# Altium PCB 7797-20-0224.PcbDoc
Units mil, origin at the board's own origin, x right, y up, seen from the top; angles counter-clockwise.
Board outline 1680 x 2600 mil, 2 copper layers (Top Layer, Bottom Layer), stack 12.8 mil thick; 102 components, 77 nets, 367 pads, 199 vias.
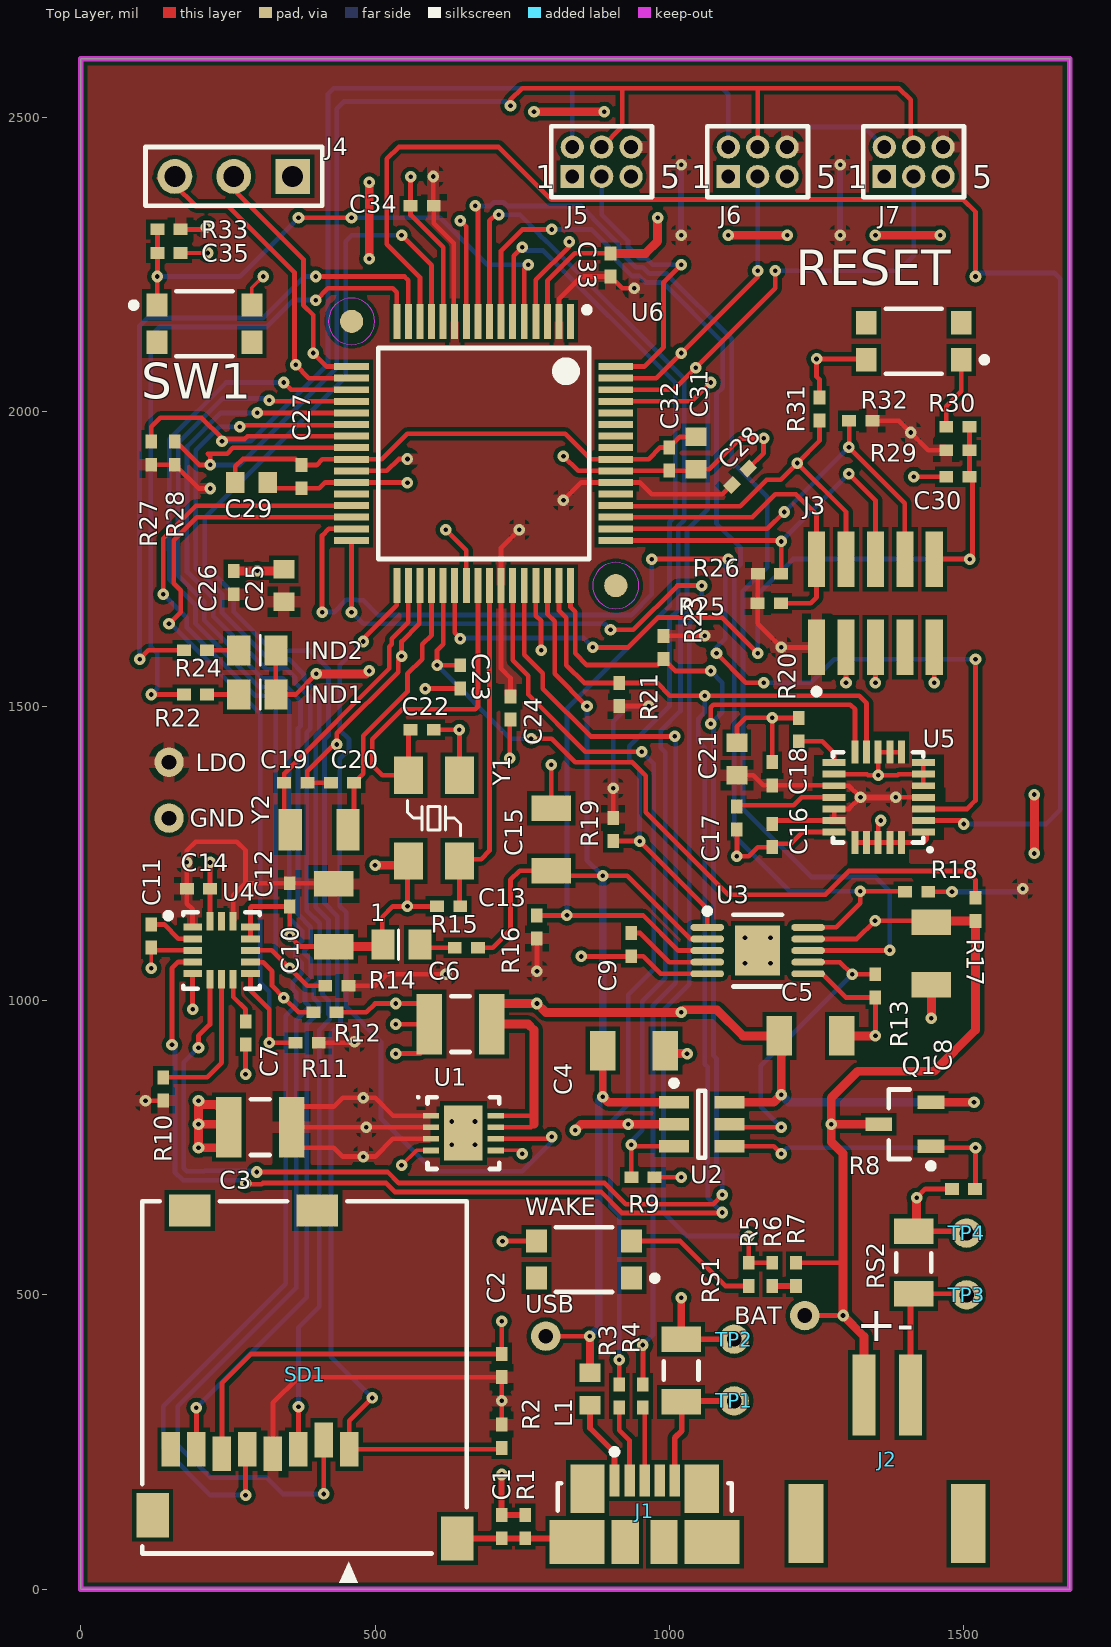
[diagram p0: Top Layer view]
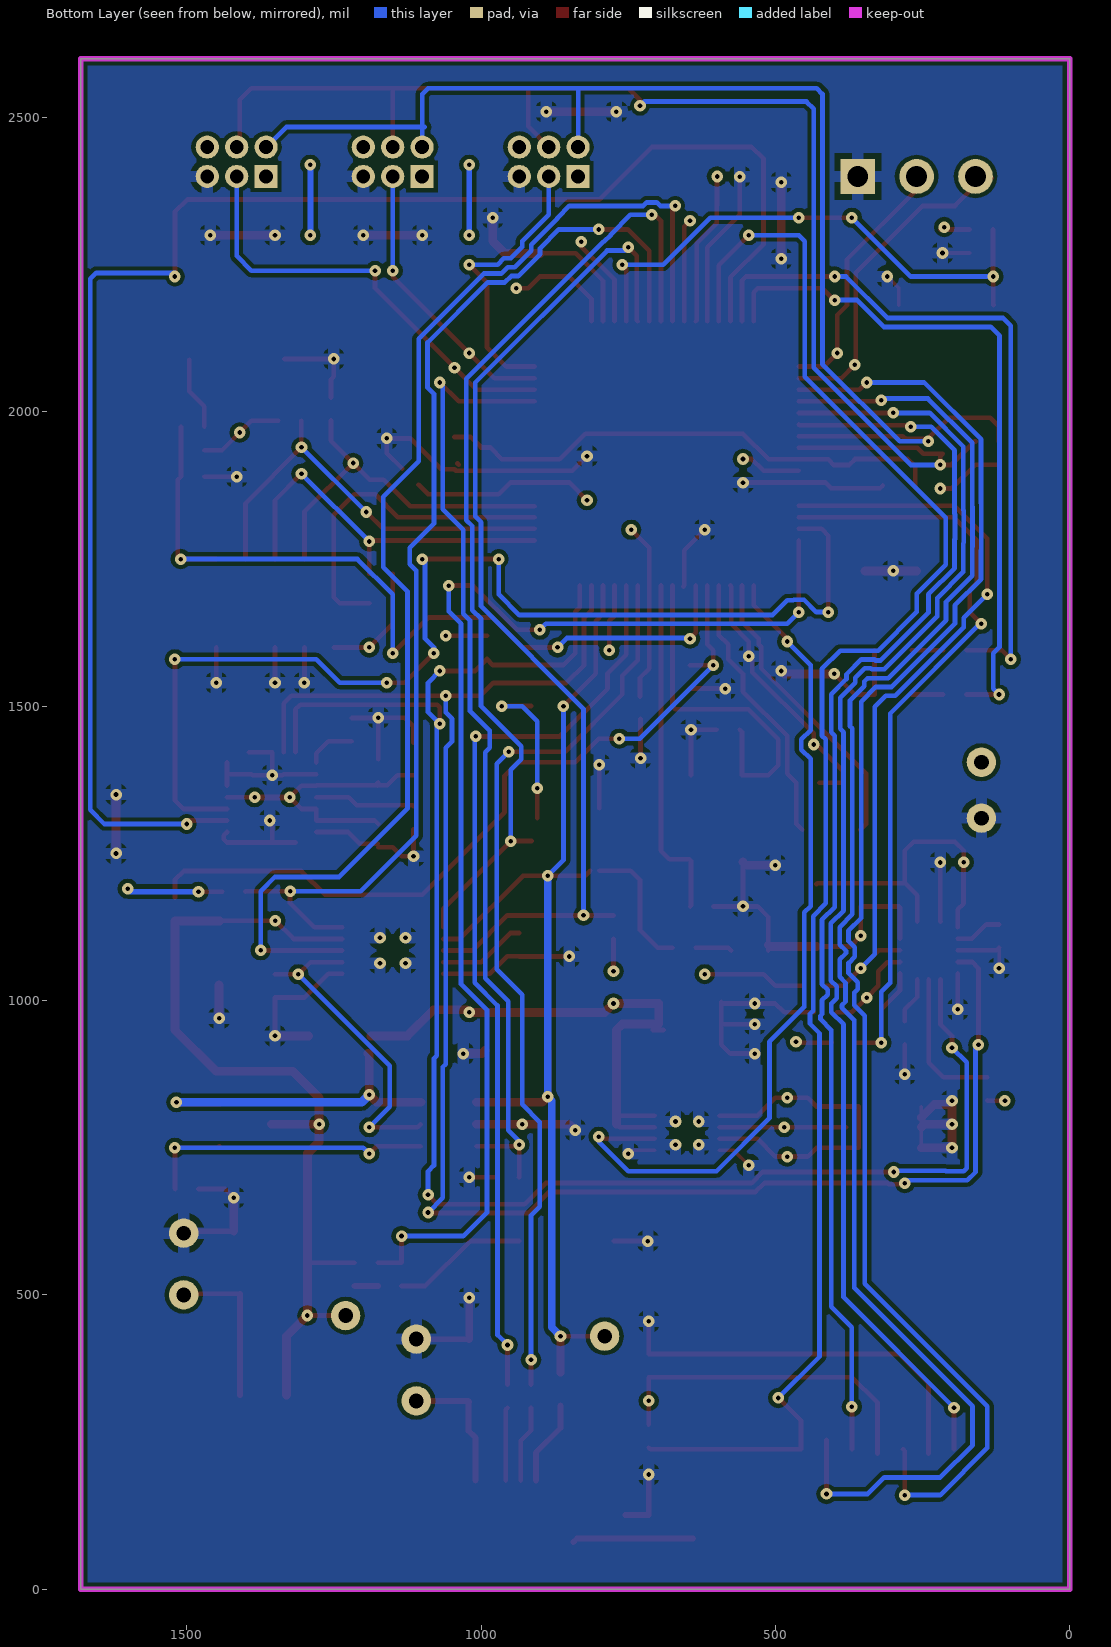
[diagram p1: Bottom Layer view, seen from below]

## Layer stack, top to bottom
Top Solder: solder mask 0.4, Solder Resist, Dk 3.5
Top Layer: signal copper 1.4
Dielectric 2: core 10, Dk 4.2
Bottom Layer: signal copper 1.4
Bottom Solder: solder mask 0.4, Solder Resist, Dk 3.5

## Board outline
20,0 1680,0 1680,2600 0,2600 0,0

## Design rules (kind name [scope] priority, off if disabled: settings)
AcuteAngle [All] p1: minimum=6.00000000000000E+0001 checktracksonly=FALSE
Clearance Clearance-uC [InComponent('U6')] p1: gap=6
Clearance [All] p2: gap=7
MinimumAnnularRing [All] p1: minimumring=5
PolygonConnect PolygonConnect_2 [All vs IsNamedPolygon('Bottom layer_full')] p1: connectstyle=Relief reliefconductorwidth=20 reliefentries=4 polygonreliefangle="90 Angle" airgapwidth=10
PolygonConnect PolygonConnect_1 [All vs IsNamedPolygon('Top layer_full')] p2: connectstyle=Relief reliefconductorwidth=20 reliefentries=4 polygonreliefangle="90 Angle" airgapwidth=10
PolygonConnect [All] p3: connectstyle=Relief reliefconductorwidth=10 reliefentries=4 polygonreliefangle="90 Angle" airgapwidth=10
RoutingVias [All] p1: holewidth=28 width=50 viastyle="Through Hole" minholewidth=28 minwidth=50 maxholewidth=28 maxwidth=50 useviatemplates=TRUE viatemplateguid#1={3E3A0D4B-A0A5-4DA1-8870-E81B4EFEB651} viatemplatename#1=v50h20
SolderMaskExpansion [All] p1: expansion=4
Width "Width Power" [(InNet('sGND') OR InNet('sPWR_3V7') OR InNet('sPWR_5V0') OR InNet('sUNREG') OR InNet('NetJ203_1') OR InNet('NetJ200_1') OR InNet('NetJ200_5'))] p1: maxlimit=15 minlimit=6 preferedwidth=15
Width [All] p2: maxlimit=10 minlimit=8 preferedwidth=8
30 further rules are at their usual default settings.

## Classes and differential pairs
component class I/O: 1 C35 IND1 IND2 J4 R15 R22 R24 R33 SW1
component class "I2C 0": R21 R23
component class "Accelerometer and Mangnetometer": C7 C10 C11 C12 C14 R10 R11 R12 R14 U4
component class Microcontroller: 90 C13 C19 C20 C22 C23 C24 C25 C26 C27 C28 C29 C30 C31 C32 C33 C34 J3 R5 R6 R7 R17 R25 R26 R29 R30 R31 R32 RESET U6 WAKE Y1 Y2
component class Power: BAT C1 C3 C4 C5 C6 C8 C9 C15 GND J1 J2 L1 LDO Q1 R1 R3 R4 R8 R9 R13 R16 R18 R19 RS1 RS2 TP1 TP2 TP3 TP4 U1 U2 U3 USB
component class Gyroscope: C16 C17 C18 C21 R20 U5
component class "I2C 1": J5 J6 J7 R27 R28
component class "Micro SD": C2 R2 SD1

## Components (designator, comment, footprint, x,y, rotation, side; value= is the part's Value field where it differs from the comment)
1 "LTST-C171TBKT" 0805 545,1095 r180 top
BAT "TP" TP_TH 1230,465 r90 top
C1 "GRM155R71A104KA01D" 0402 715,106.38 r270 top
C2 "GRM155R71C103KA01D" 0402 715,380 r270 top
C3 "GRM32ER71H106KA12L" 1210 305,785 r0 top
C4 "GRM31CR71H475KA12L" 1206 940,915 r180 top
C5 "GRM31CR71H475KA12L" 1206 1240,940 r180 top
C6 "GRM32ER71H106KA12L" 1210 645,960 r0 top
C7 "GRM155R71A104KA01D" 0402 280,945 r270 top
C8 "GRM31CR71H475KA12L" 1206 1445,1080 r90 top
C9 "GRM155R71A104KA01D" 0402 935,1095 r90 top
C10 "GRM31CR71H475KA12L" 1206 430,1145 r90 top
C11 "GRM155R71A104KA01D" 0402 120,1109.69 r270 top
C12 "GRM155R71A104KA01D" 0402 355,1179.68 r90 top
C13 "GRM1555C1H330FA01D" 0402 625,1160 r0 top
C14 "GRM155R71A104KA01D" 0402 200,1190 r180 top
C15 "GRM31CR71H475KA12L" 1206 799.37,1273.78 r270 top
C16 "GRM155R71A104KA01D" 0402 1174.69,1280.32 r90 top
C17 "GRM155R71A104KA01D" 0402 1114.69,1310.32 r270 top
C18 "GRM155R71A104KA01D" 0402 1174.69,1385.32 r270 top
C19 "GRM1555C1H240GA01D" 0402 365.32,1370 r180 top
C20 "GRM1555C1H240GA01D" 0402 444.69,1370 r0 top
C21 "GRM188R71A105KA61J" 0603 1114.69,1410.32 r90 top
C22 "GRM1555C1H330FA01D" 0402 580,1460 r180 top
C23 "GRM155R71A104KA01D" 0402 645,1550 r270 top
C24 "GRM155R71A104KA01D" 0402 730,1497 r270 top
C25 "GRM188R71A105KA61J" 0603 345,1705 r90 top
C26 "GRM155R71C103KA01D" 0402 260,1710 r90 top
C27 "GRM155R71A104KA01D" 0402 375,1890 r270 top
C28 "GRM155R71C103KA01D" 0402 1120,1890 r45 top
C29 "GRM188R71A225KE15D" 0603 290,1880 r0 top
C30 "GRM155R71A104KA01D" 0402 1490,1890 r180 top
C31 "GRM188R71A105KA61J" 0603 1045,1930 r270 top
C32 "GRM155R71A104KA01D" 0402 1000,1920 r270 top
C33 "GRM155R71C103KA01D" 0402 900,2249.69 r90 top
C34 "GRM155R71A104KA01D" 0402 580,2350 r180 top
C35 "GRM022R71A102KA12L" 0402 150,2270 r180 top
GND "TP" TP_TH 150,1310 r90 top
IND1 "LTST-C171GKT" 0805 300,1520 r0 top
IND2 "LTST-C171KSKT" 0805 300,1595 r0 top
J1 "47346-0001" MOLX-47346-0001-5_V 957.97,87.87 r0 top locked
J2 "S2B-PH-SM4-TB" S2B-PH-SM4-TB 1370,330 r0 top locked
J3 "M50-3600542" M50-3600542 1350,1675 r0 top
J4 "Header 3" HDR1X3 360,2400 r180 top
J5 "GRPB032VWVN-RC" GRPB032VWVN-RC 835,2400 r0 top
J6 "GRPB032VWVN-RC" GRPB032VWVN-RC 1100,2400 r0 top
J7 "GRPB032VWVN-RC" GRPB032VWVN-RC 1365,2400 r0 top
L1 "MPZ1608S331A" 1608[0603] 865,340 r90 top
LDO "TP" TP_TH 150,1405 r90 top
Q1 "IRLML6401" Micro3_N 1400,790 r180 top
R1 "CRCW04021M00FKEDHP" 0402 755,106.38 r270 top
R2 "CRCW040210K0FKEDHP" 0402 715,260 r90 top
R3 "CRCW040233R0FKED" 0402 915,328.19 r90 top
R4 "CRCW040233R0FKED" 0402 955,328.19 r90 top
R5 "CRCW0402100KFKED" 0402 1135,535 r90 top
R6 "CRCW0402100KFKED" 0402 1175,535 r90 top
R7 "CRCW0402100KFKED" 0402 1215,535 r270 top
R8 "CRCW04021M00FKEDHP" 0402 1499.69,680 r0 top
R9 "CRCW040210K0FKED" 0402 955,700 r180 top
R10 "CRCW040210K0FKED" 0402 140,850 r270 top
R11 "CRCW040210K0FKED" 0402 384.69,928.33 r180 top
R12 "CRCW040210K0FKED" 0402 415,980 r0 top
R13 "CRCW04023K40FKED" 0402 1350,1025 r90 top
R14 "CRCW040210K0FKED" 0402 435,1025 r180 top
R15 "CRCW0402560RFKEDHP" 0402 655,1090 r0 top
R16 "CRCW040210K0FKED" 0402 775,1125 r90 top
R17 "CRCW040256R0FKED" 0402 1520,1155 r270 top
R18 "CRCW040210K0FKED" 0402 1420,1185 r180 top
R19 "CRCW040210K0FKED" 0402 904.37,1290.63 r270 top
R20 "CRCW040210K0FKED" 0402 1219.69,1460.32 r90 top
R21 "CRCW04025K60FKEDHP" 0402 915,1520 r270 top
R22 "CRCW0402560RFKEDHP" 0402 195,1520 r180 top
R23 "CRCW04025K60FKEDHP" 0402 990,1600 r90 top
R24 "CRCW0402560RFKEDHP" 0402 195,1595 r180 top
R25 "CRCW040210K0FKED" 0402 1169.69,1675 r0 top
R26 "CRCW040210K0FKED" 0402 1170,1725 r0 top
R27 "CRCW04025K60FKEDHP" 0402 120,1930 r270 top
R28 "CRCW04025K60FKEDHP" 0402 160,1930 r270 top
R29 "CRCW040210K0FKED" 0402 1490,1935 r180 top
R30 "CRCW0402560RFKEDHP" 0402 1490,1975 r0 top
R31 "CRCW040210K0FKED" 0402 1255,2005 r270 top
R32 "CRCW040210K0FKED" 0402 1325,1985 r180 top
R33 "CRCW040210K0FKEDHP" 0402 150,2310 r0 top
RESET "KMR231GLFS" CKCP-KMR231GLFS 1415,2120 r180 top
RS1 "WSL1206R1000FEA" C1206 1020,371.5 r270 top
RS2 "WSL1206R1000FEA" C1206 1415,555 r270 top
SD1 "2908-05WB-MG" 3M-2908-05WB-MG_V 380,360 r180 top locked
SW1 "KMR231GLFS" CKCP-KMR231GLFS 210,2150 r0 top
TP1 "TP" TP_TH 1110,320 r90 top
TP2 "TP" TP_TH 1110,425 r90 top
TP3 "TP" TP_TH 1505,500 r90 top
TP4 "TP" TP_TH 1505,605 r90 top
U1 "LT1965EDD-3.3#TRPBF" LT-DD-8_V 650,775 r0 top
U2 "LTC4410ES6#PBF" LT-S6-6-TSOT-23_N 1055,790 r0 top
U3 "LTC4053EMSE-4.2#PBF" LT-MSE-10-EDP-2060x1830TP_N 1150,1085 r0 top
U4 "FXOS8700CQR1" FREE-QFN-16-3000X3000DE_V 239.21,1085.32 r0 top
U5 "FXAS21002C" "SMD QFN 24_4X4MM 7/5" 1354.69,1345.32 r180 top
U6 "TM4C123GH6PM" QFP50P1200X1200X160-64N 684.53,1929.41 r270 top
USB "TP" TP_TH 790,430 r90 top
WAKE "KMR231GLFS" CKCP-KMR231GLFS 855,560 r180 top
Y1 "ECS-160-20-30B-DU" ECX-53B 600,1310 r90 top
Y2 "CC7V-T1A-32.768kHz-12.5pF-20PPM-TC-QC" CC7V-T1A 405,1290 r0 top

## Footprints (in the part's own frame and the unit in brackets; to place one, negate y for a bottom-side part, rotate by r counter-clockwise, add the part's x,y. Pads: shape width x height; smd on the part's side, far side on the other; paste and mask are expansions set on the pad)
3M-2908-05WB-MG_V [mm] "Connector, MicroSD, 8 Position, Body 15.2x14mm, Pitch 1.1mm"
  rect 0.8x1.5 smd: 1(-1.94,3.1) 2(-0.84,2.7) 3(0.26,3.1) 4(1.36,3.3) 5(2.46,3.1) 6(3.56,3.3) 7(4.66,3.1) 8(5.76,3.1)
  rect 1.4x1.9 smd: 9(6.55,5.95) 12(-6.6,6.95)
  rect 1.8x1.4 smd: 10(4.95,-7.2) 11(-0.55,-7.2)
  silkscreen extent -7,-7.6 7,8.87, body extent -7,-7.6 7,7.6, height 1.85
0402 [mm] "Chip Capacitor, Body 1.0x0.5mm, IPC High Density"
  rect 0.6x0.5 smd: 1(-0.5,0) 2(0.5,0)
  body extent -0.55,-0.3 0.55,0.3, height 1.3
0603 [mm] "Chip Capacitor, Body 1.6x0.8mm, IPC High Density"
  rect 0.8x0.9 smd: 1(-0.7,0) 2(0.7,0)
  body extent -0.87,-0.48 0.87,0.48, height 1.3
0805 [mm]
  rect 1x1.3 smd: 1(-0.8,0) 2(0.8,0)
  silkscreen extent 0.13,-0.64 0.13,0.63, body extent -1.07,-0.64 1.07,0.76, height 0.7
1206 [mm] "Chip Capacitor, Body 3.2x1.6mm, IPC High Density"
  rect 1.1x1.7 smd: 1(-1.35,0) 2(1.35,0)
  body extent -1.7,-0.9 1.7,0.9, height 1.3
1210 [mm] "Chip Capacitor, Body 3.2x2.5mm, IPC High Density"
  rect 1.1x2.6 smd: 1(-1.35,0) 2(1.35,0)
  silkscreen extent -0.4,-1.2 0.4,1.2, body extent -1.7,-1.35 1.7,1.35, height 1.3
1608[0603] [mm] "Chip Capacitor, Body 1.6x0.8mm, IPC High Density"
  rect 0.8x0.9 smd: 1(-0.7,0) 2(0.7,0)
  body extent -0.87,-0.48 0.87,0.48, height 1.3
C1206 [mm] "Chip Capacitor, Body 3.2x1.6mm, IPC High Density"
  rect 1.1x1.7 smd: 1(-1.35,0) 2(1.35,0)
  silkscreen extent -0.4,-0.75 0.4,0.75, body extent -1.7,-0.9 1.7,0.9, height 1.3
CC7V-T1A [mm]
  rect 1x1.8 smd: 1(-1.25,0) 2(1.25,0)
  body extent -1.65,-0.76 1.65,0.76, height 0.9
CKCP-KMR231GLFS [mm] "SMD, 4-Leads, Body 4.6x2.8mm"
  rect 0.9x1 smd: 1(-2.05,0.8) 2(-2.05,-0.8) 3(2.05,0.8) 4(2.05,-0.8)
  silkscreen extent -3.17,-1.4 1.21,1.4, body extent -2.3,-1.4 2.3,1.4, height 1.92
ECX-53B [mm]
  rect 1.6x1.25 smd: 1(-1.85,-1.1) 2(1.85,-1.1) 3(1.85,1.1) 4(-1.85,1.1)
  silkscreen extent -0.76,-1.14 0.76,1.14, body extent -2.54,-1.65 2.54,1.65, height 0.85
FREE-QFN-16-3000X3000DE_V [mm] "QFN, 16-Leads, Body 3.00x3.00mm, Pitch 0.50mm"
  rect 0.8x0.3 smd: 1(-1.25,1) 2(-1.25,0.5) 3(-1.25,0) 4(-1.25,-0.5) 5(-1.25,-1) 9(1.25,-1) 10(1.25,-0.5) 11(1.25,0) 12(1.25,0.5) 13(1.25,1)
  rect 0.3x0.8 smd: 6(-0.5,-1.25) 7(0,-1.25) 8(0.5,-1.25) 14(0.5,1.25) 15(0,1.25) 16(-0.5,1.25)
  silkscreen extent -2.42,-1.65 1.65,1.65, body extent -1.5,-1.5 1.5,1.5, height 1.25
GRPB032VWVN-RC [mm] "Connector; Header; 3x2 Position"
  rect 1x1 hole 0.6: 1(0,0)
  round 1 hole 0.6: 2(0,1.27) 3(1.27,0) 4(1.27,1.27) 5(2.54,0) 6(2.54,1.27)
  silkscreen extent -0.9,-0.9 3.44,2.17, body extent -0.64,-1.06 3.17,2.33, height 4.17
HDR1X3 [mm] "Connector; Header; 3 Position"
  rect 1.5x1.5 hole 0.9: 1(0,0)
  round 1.5 hole 0.9: 2(2.54,0) 3(5.08,0)
  silkscreen extent -1.27,-1.27 6.35,1.27
LT-DD-8_V [mm] "SON, 8-Leads, Body 3x3mm, Pitch 0.5mm, Thermal Pad 1.65x2.38 mm, IPC Low Density"
  rect 0.7x0.25 smd mask+0.102: 1(-1.4,0.75) 2(-1.4,0.25) 3(-1.4,-0.25) 4(-1.4,-0.75) 5(1.4,-0.75) 6(1.4,-0.25) 7(1.4,0.25) 8(1.4,0.75)
  rect 1.65x2.38 smd mask+0.102: 9(0,0)
  silkscreen extent -2,-1.55 1.55,1.6, body extent -1.5,-1.5 1.5,1.5, height 0.8
LT-MSE-10-EDP-2060x1830TP_N [mm] "SOP, 10-Leads, Body 3.1x3.1mm, Pitch 0.5mm, Thermal Pad 2.17x1.94mm, IPC Medium Density"
  oval 1.45x0.3 smd: 1(-2.175,1) 2(-2.175,0.5) 3(-2.175,0) 4(-2.175,-0.5) 5(-2.175,-1) 6(2.175,-1) 7(2.175,-0.5) 8(2.175,0) 9(2.175,0.5) 10(2.175,1)
  rect 1.94x2.17 smd: 11(0,0)
  silkscreen extent -2.3,-1.55 1.05,1.82, body extent -1.55,-1.55 1.55,1.55, height 1.1
LT-S6-6-TSOT-23_N [mm] "SOT23, 6-Leads, Body 2.9x1.75mm, Pitch 0.95mm, IPC Medium Density"
  rect 1.3x0.55 smd: 1(-1.2,0.95) 2(-1.2,0) 3(-1.2,-0.95) 4(1.2,-0.95) 5(1.2,0) 6(1.2,0.95)
  silkscreen extent -1.32,-1.45 0.15,1.9, body extent -0.87,-1.45 0.87,1.45, height 1
M50-3600542 [mm] "Header, 0.05\", 2x10, SMT"
  rect 0.74x2.4 smd: 1(-2.54,-1.905) 2(-2.54,1.905) 3(-1.27,-1.905) 4(-1.27,1.905) 5(0,-1.905) 6(0,1.905) 7(1.27,-1.905) 8(1.27,1.905) 9(2.54,-1.905) 10(2.54,1.905)
  silkscreen extent -2.67,-3.94 -2.41,-3.68, body extent -3.18,-2.62 3.17,2.88, height 4.7
Micro3_N [mm] "SOT23, 3-Leads, Body 2.9x1.3mm, Pitch 0.95mm, Lead Span 2.3mm, IPC Medium Density"
  rect 1.15x0.6 smd: 1(-1.125,0.95) 2(-1.125,-0.95) 3(1.125,0)
  silkscreen extent -1.25,-1.5 0.7,1.92, body extent -0.7,-1.5 0.7,1.5, height 1.12
MOLX-47346-0001-5_V [mm] "SMD, 5-Leads, Body 7.5x5mm, Pitch 0.65mm"
  rect 0.45x1.38 smd: 1(-1.3,2.46) 2(-0.65,2.46) 3(0,2.46) 4(0.65,2.46) 5(1.3,2.46)
  rect 1.475x2.1 smd: 6(-2.462,2.1) 7(2.462,2.1)
  rect 2.375x1.9 smd: 8(-2.913,-0.2) 11(2.913,-0.2)
  rect 1.175x1.9 smd: 9(-0.837,-0.2) 10(0.837,-0.2)
  silkscreen extent -3.75,1.17 3.75,3.82, body extent -3.99,-2.78 3.99,2.65, height 2.69
QFP50P1200X1200X160-64N [mm]
  rect 1.5x0.3 smd: 1(-5.7,3.75) 2(-5.7,3.25) 3(-5.7,2.75) 4(-5.7,2.25) 5(-5.7,1.75) 6(-5.7,1.25) 7(-5.7,0.75) 8(-5.7,0.25) 9(-5.7,-0.25) 10(-5.7,-0.75) 11(-5.7,-1.25) 12(-5.7,-1.75) 13(-5.7,-2.25) 14(-5.7,-2.75) 15(-5.7,-3.25) 16(-5.7,-3.75) 33(5.7,-3.75) 34(5.7,-3.25) 35(5.7,-2.75) 36(5.7,-2.25) 37(5.7,-1.75) 38(5.7,-1.25) 39(5.7,-0.75) 40(5.7,-0.25) 41(5.7,0.25) 42(5.7,0.75) 43(5.7,1.25) 44(5.7,1.75) 45(5.7,2.25) 46(5.7,2.75) 47(5.7,3.25) 48(5.7,3.75)
  rect 0.3x1.5 smd: 17(-3.75,-5.7) 18(-3.25,-5.7) 19(-2.75,-5.7) 20(-2.25,-5.7) 21(-1.75,-5.7) 22(-1.25,-5.7) 23(-0.75,-5.7) 24(-0.25,-5.7) 25(0.25,-5.7) 26(0.75,-5.7) 27(1.25,-5.7) 28(1.75,-5.7) 29(2.25,-5.7) 30(2.75,-5.7) 31(3.25,-5.7) 32(3.75,-5.7) 49(3.75,5.7) 50(3.25,5.7) 51(2.75,5.7) 52(2.25,5.7) 53(1.75,5.7) 54(1.25,5.7) 55(0.75,5.7) 56(0.25,5.7) 57(-0.25,5.7) 58(-0.75,5.7) 59(-1.25,5.7) 60(-1.75,5.7) 61(-2.25,5.7) 62(-2.75,5.7) 63(-3.25,5.7) 64(-3.75,5.7)
  round 1 smd mask+0.5: 65(-5.7,-5.7) 66(5.7,5.7)
  Top Layer keep-out region: -4.7,-5.7 -4.776,-5.317 -4.993,-4.993 -5.317,-4.776 -5.7,-4.7 -5.7,-4.7 -6.083,-4.776 -6.407,-4.993 -6.624,-5.317 -6.7,-5.7 -6.7,-5.7 -6.624,-6.083 -6.407,-6.407 -6.083,-6.624 -5.7,-6.7 -5.7,-6.7 -5.317,-6.624 -4.993,-6.407 -4.776,-6.083 -4.7,-5.7
  Top Layer keep-out region: 6.7,5.7 6.624,6.083 6.407,6.407 6.083,6.624 5.7,6.7 5.7,6.7 5.317,6.624 4.993,6.407 4.776,6.083 4.7,5.7 4.7,5.7 4.776,5.317 4.993,4.993 5.317,4.776 5.7,4.7 5.7,4.7 6.083,4.776 6.407,4.993 6.624,5.317 6.7,5.7
  silkscreen extent -6.32,-4.55 4.55,4.58, body extent -6.07,-6.07 6.07,6.07, height 1.62
S2B-PH-SM4-TB [mm] "2 pin JST connector"
  rect 1.5x3.4 smd: 0(-3.5,-5.55) 0(3.5,-5.55)
  rect 1x3.5 smd: 1(1,0) 2(-1,0)
  body extent -3.96,-7.22 3.94,1.38, height 5.6
"SMD QFN 24_4X4MM 7/5" [mm]
  rect 1x0.3 smd: 1(-1.95,1.5) 2(-1.95,1) 3(-1.95,0.5) 4(-1.95,0) 5(-1.95,-0.5) 6(-1.95,-1) 7(-1.95,-1.5) 13(1.9,-1.5) 14(1.9,-1) 15(1.9,-0.5) 16(1.9,0) 17(1.9,0.5) 18(1.9,1) 19(1.9,1.5)
  rect 0.3x1 smd: 8(-1,-1.95) 9(-0.5,-1.95) 10(0,-1.95) 11(0.5,-1.95) 12(1,-1.95) 20(1,1.95) 21(0.5,1.95) 22(0,1.95) 23(-0.5,1.95) 24(-1,1.95)
  silkscreen extent -2.27,-1.95 1.95,2.3, body extent -2,-2.01 2.01,2, height 0.9
TP_TH [mil]
  round 50 hole 25: 1(0,0)

## Part data
1: library part LTST-C171GKT, "LED"
C1 C7 C9 C11 C12 C14 C16 C17 C18 C23 C24 C27 C30 C32 C34: library part GRM155R71AxxxKdddd, "-55-125C, 1005, 10V, X7R, ±10%"
C2 C26 C28 C33: library part Cap, "Cap, 0.01 µF, 16 V, X7R"
C3 C6: library part GRM32ER71HxxxKdddd, "-55-125C, 1005, 50V, X7R, ±10%"
C4 C5 C8 C10 C15: library part GRM31CR71HxxxKdddd, "-55-125C, 3216, 50V, X7R, ±10%"
C13 C19 C20 C22: library part "Cap Semi", "Capacitor (Semiconductor SIM Model)"
C21 C25 C29 C31: library part GRM188R71AxxxKdddd, "-55-125C, 1608, 10V, X7R, ±10%"
C35: library part GRM022R71AxxxKdddd, "-55-125C, 1005, 10V, X7R, ±10%"
IND1 IND2: "LED"
J1: library part CMP-2000-05246-1, "Micro-USB B Receptacle with Flange, -30 to 85 degC, 5-Pin SMD, RoHS, Tape and Reel"
J2: "JST Battery Connector"
J4: "Header, 3-Pin"
J5 J6 J7: "2x3 Header, 0.05\" spacing"
L1: library part Inductor, "EMI Filter Beads, Chips & Arrays 0603 330ohms 100MHz Rdc 0.08ohms 1.7A"
Q1: "MOSFET P-CH 12V 4.3A SOT-23"
R1 R2 R3 R4 R5 R6 R7 R8 R9 R10 R11 R12 R13 R14 R15 R16 R17 R18 R19 R20 R21 R22 R23 R24 R25 R26 R27 R28 R29 R30 R31 R32 R33: library part CRCW0402xxxxFKED, "0.125W, -55-155C, 1005, 50V, ±1%"
RESET SW1 WAKE: library part CMP-2000-06516-1, "Switch Tactile, SPST, 50 mA, 32 V, -40 to 85 degC, 4-Pin SMD, RoHS, Tape and Reel"
RS1 RS2: library part "Res Semi", "Current Sense Resistors - SMD 1/4watt .1ohms 1%"
SD1: library part CMP-2000-05030-1, "Card Connector Micro-SD, 500 VAC, 100 mOhm Min, 0.5 A, RoHS, Tape and Reel"
U1: library part CMP-0476-00225-1, "1.1 A, Low Noise, Low Dropout Linear Regulator, 1.8 to 20 V Vin, 3.3 V Vout, 8-pin SON (DD-8), -40 to 125 degC, Pb-Free, Tape and Reel"
U2: "USB Power Manager, 4.35 to 5.5 V Vin, 6-pin SOT23 (S6-6), -40 to 85 degC, Pb-Free"
U3: "USB Compatible Lithium-Ion Battery Charger with Thermal Regulation, 4.25 to 6.5 V Vin, 10-pin SOP (MSE-10-EDP), -40 to 85 degC, Pb-Free"
U4: library part CMP-2000-05129-1, "6-Axis Xtrinsic Sensor with Integrated Linear Accelerometer and Magnetometer, 1.95 to 3.6 V, -40 to 85 degC, 16-Pin QFN, RoHS, Tape and Reel"
U5: "3-Axis Digital Angular Rate  Gyroscope"
U6: "Tiva TM4C123GH6PM Microcontroller"
Y1: "Crystal, 16.000MHz, 20pF, 100ppm, -55 to 125 C, 60 O"
Y2: library part CC7V-T1A, "Crystals 32.768 kHz 12.5 pF +/-20 PPM -55/+125C"

## Via types
v1: diameter 19.68, hole 7.87, Top Layer to Bottom Layer, 199 vias

## Nets (pads, with @x,y where several pads share a name; then routed paths per layer and width w, separated by ;. In a path a pad name is that pad's centre, name@x,y a point inside that pad or via, vN(x,y) a via of type N, cw(c..) or ccw(c..) an arc to the next point about the centre after c; other vN are vias at no path point)
A0/sIO_UARTRX: J4.2 U6.17 | length 439.9
  Top Layer w8: J4.2@282.5,2400 260,2377.5 378.32,2259.18 378.32,2181.37 395,2164.68 v1(395,2100) 417.95,2077.05 U6.17
A1/sIO_UARTTX: J4.3 U6.18 | length 609.3
  Top Layer w8: J4.3@182.5,2397.5 132.5,2397.5 145,2385 160,2385 195,2350 250,2350 320,2280 345,2255 363.32,2236.69 363.32,2081.69 v1(365,2080) 387.64,2057.36 U6.18
A2/SPI0_SCK: SD1.5 U6.19 | length 2541.5
  Top Layer w8: v1(280,160) 280,234.8 SD1.5 ; v1(345,2050) 357.32,2037.68 U6.19
  Bottom Layer w8: v1(280,160) 220,160 140,240 140,311.1 348.16,519.26 348.16,974.44 365.84,992.12 365.84,1013.63 360,1019.48 360,1030.84 375.69,1046.53 375.69,1063.79 365,1074.48 365,1090.52 375.84,1101.37 375.84,1118.63 354.16,1140.32 354.16,1507.73 329.07,1532.82 302.33,1532.82 195,1640.15 195,1671.36 150.61,1715.75 150.61,1764.54 150,1765.15 150,1844.85 150.61,1845.46 150.61,1953.72 246.88,2050 v1(345,2050)
A3/sSD_CS: SD1.2 U6.20 | length 2631
  Top Layer w8: v1(320,2020) 322.01,2017.99 U6.20 ; v1(413.07,161.93) SD1.2
  Bottom Layer w8: v1(320,2020) 320,2022.69 240.78,2022.69 165.61,1947.51 165.61,1839.25 165,1838.64 165,1771.36 165.61,1770.75 165.61,1721.97 210,1677.57 210,1646.36 308.54,1547.82 343.39,1547.82 349.16,1542.06 349.16,1533.94 373.34,1509.76 373.34,1466.45 369.16,1462.27 369.16,1146.53 390.84,1124.85 390.84,1095.15 380,1084.31 380,1080.69 390.69,1070 390.69,1040.31 380.84,1030.47 380.84,997.83 386.84,991.83 386.84,987.67 366.16,966.98 366.16,511.81 165,310.65 165,245 220,190 315,190 343.07,161.93 v1(413.07,161.93)
A4/sSPI0_MISO: SD1.7 U6.21 | length 2221.1
  Top Layer w8: SD1.7 v1(196.53,308.46) ; v1(300,1998.31) U6.21
  Bottom Layer w8: v1(196.53,308.46) 384.16,496.09 384.16,959.53 404.84,980.21 404.84,995.05 395.84,1004.05 395.84,1024.26 405.69,1034.1 405.69,1088.78 405.84,1088.94 405.84,1131.06 384.16,1152.75 384.16,1456.06 390,1461.9 390,1514.31 364.16,1540.15 364.16,1548.27 347.95,1564.48 337.95,1564.48 336.29,1562.82 314.75,1562.82 225,1652.57 225,1683.79 180.61,1728.18 180.61,1776.97 180,1777.57 180,1832.43 180.61,1833.03 180.61,1941.3 237.62,1998.31 v1(300,1998.31)
A5/sSPI0_MOSI: SD1.3 U6.22 | length 2136.5
  Top Layer w8: v1(270,1975) 267.54,1977.46 458.96,1977.46 U6.22 ; SD1.3 369.76,309.76 v1(370,310)
  Bottom Layer w8: v1(270,1975) 235.53,1975 195.61,1935.08 195.61,1826.82 195,1826.21 195,1783.79 195.61,1783.18 195.61,1734.39 240,1690 240,1658.79 320.97,1577.82 330.08,1577.82 331.74,1579.48 354.16,1579.48 379.16,1554.48 379.16,1546.37 405,1520.52 405,1455.69 399.16,1449.85 399.16,1158.96 420.84,1137.27 420.84,1082.73 420.69,1082.57 420.69,1066.89 420.84,1066.73 420.84,1028.04 410.84,1018.04 410.84,1010.26 420.84,1000.26 420.84,976.73 423.16,974.42 423.16,968.16 405,950 405,480 370,445 v1(370,310)
A6/sI2C1_SCL: J5.2 J6.2 J7.2 R27.1 U6.23 | length 2283
  Top Layer w8: R27.1 120,1975 135,1990 205,1990 v1@240,1955 ; U6.23 283.41,1958.94 278.63,1954.16 240.84,1954.16 v1@240,1955 ; v1@240,1955 v1(240,1950) v1@240,1955
  Bottom Layer w8: v1(240,1950) 288.79,1950 420,2081.21 420,2540 430,2550 1090,2550 1100,2540 J6.2 ; 835,2550 835,2480 ; 1096,2484 1331,2484 J7.2 ; 835,2480 J5.2 835,2480
A7/sI2C1_SDA: J5.4 J6.4 J7.4 R28.1 U6.24 | length 2424.2
  Top Layer w8: R28.1 160.31,1950 161.21,1950 201.21,1910 v1(220,1910) 220,1925 215.84,1929.16 248.63,1929.16 258.63,1939.16 460.02,1939.16 U6.24 ; v1(730,2520) 730,2530 750,2550 1150,2550 ; J5.4 920,2485 920,2550 ; 1150,2483.69 J6.4 1150,2550 ; J7.4@1415,2465 J7.4 1410,2455 1410,2530 1390,2550 1150,2550
  Bottom Layer w8: v1(220,1910) 270,1910 435,2075 435,2515 447.18,2527.18 722.82,2527.18 v1(730,2520)
B2/sI2C0_SCL: R21.1 U4.4 U5.11 U6.47 | length 3006.6
  Top Layer w8: v1(155,925) 155,1055 165.63,1065.63 U4.4 ; v1(280,690) 281.97,688.03 307.5,688.03 309.48,690 518.79,690 533.79,675 883.79,675 919.63,639.16 v1@1089.16,639.16 ; U6.47 812.48,1662.52 825,1650 825,1570 855.31,1539.68 R21.1 979.1,1539.68 1000.98,1517.81 v1(1060,1517.81) 1322.19,1517.81 1335,1505 U5.11
  Bottom Layer w8: v1(155,925) 160,920 160,708.79 173.79,695 275,695 v1(280,690) ; v1(1060,1517.81) 1060,1489.48 1049.16,1478.63 1049.16,1440.31 1060,1429.47 1060,892.21 1065,887.21 1065,665 v1(1090,640)
B3/sI2C0_SDA: R23.1 U4.6 U5.12 U6.48 | length 2922.4
  Top Layer w8: v1(200,920) 200,940 219.53,959.53 U4.6 ; v1(298.87,708.87) 521.13,708.87 540,690 890,690 925.84,654.16 1074.16,654.16 v1(1090,670) ; U6.48 832.16,1668.29 840,1660.46 840,1590 860,1570 979.69,1570 R23.1 ; R23.1@990,1580 1010,1560 v1(1070,1560) ; v1(1070,1470) 1070,1498.34 1074.48,1502.81 1307.19,1502.81 1315.31,1494.69 U5.12
  Bottom Layer w8: v1(200,920) 175,895 175,715 180,710 210,710 210.84,710.84 296.9,710.84 v1(298.87,708.87) ; v1(1070,1560) 1090,1540 1090,1490 v1(1070,1470) 1075,1465 1075,906.52 1080,901.52 1080,720 1090,710 v1(1090,670)
C4/sIO_IND1: R22.2 U6.16 | length 1176.5
  Top Layer w8: v1(120,1520) R22.2 ; v1(399.16,2190) 400,2190 420,2210 530,2210 536.89,2203.11 U6.16
  Bottom Layer w8: v1(120,1520) 130,1530 130,1590 119.16,1600.84 119.16,2129.16 134.39,2144.39 315.61,2144.39 361.21,2190 v1(399.16,2190)
C5/sIO_IND2: R24.2 U6.15 | length 1211.5
  Top Layer w8: v1(100,1580) 115,1595 R24.2 ; v1(399.16,2230) 550,2230 556.57,2223.43 U6.15
  Bottom Layer w8: v1(100,1580) 100,2146.45 112.94,2159.39 309.39,2159.39 380,2230 v1(399.16,2230)
C6/sGYRO_INT2: U5.2 U6.14 | length 2761.4
  Top Layer w8: U6.14 576.26,2228.74 520,2285 520,2430 540,2450 710,2450 799.16,2360.84 1499.16,2360.84 1520,2340 v1(1520,2230) ; U5.2 1499.06,1305.94 1500,1305 v1(1500,1300)
  Bottom Layer w8: v1(1500,1300) 1640,1300 1664,1324 1664,2226 1653.84,2236.16 v1@1520,2236.16
C7/sSD_CD: R2.1 SD1.1 U6.13 | length 2867.9
  Top Layer w8: v1(495,325) 456.38,286.38 SD1.1 712.64,237.95 R2.1 ; v1(545,2300) 595.94,2249.05 U6.13
  Bottom Layer w8: v1(495,325) 425,395 425,944.54 441.16,960.7 441.16,977.63 435.84,982.94 435.84,1072.94 435.69,1073.1 435.69,1076.36 435.84,1076.51 435.84,1143.49 414.16,1165.17 414.16,1443.63 420.84,1450.32 420.84,1563.63 390,1594.48 325.52,1594.48 259.74,1660.26 259.74,1691.48 210.61,1740.61 210.61,1820.61 450,2060 450,2290 460,2300 v1(545,2300)
cGND: C1.2 J1.8 R1.2 SD1.12 | length 206.1
  Top Layer w10: SD1.12 836.93,86.38 J1.8
D0/sBMS_MODE: R9.2 U2.3 U6.61 | length 1660.3
  Top Layer w8: U6.61 1037.99,2017.99 v1(1070,2050) ; R9.2 935,700.31 v1(935,755) 937.4,752.6 U2.3
  Bottom Layer w8: v1(935,755) 935,761.28 953.84,780.12 953.84,998.84 992.87,1037.87 992.87,1422.13 985.37,1429.63 985.37,1458.66 1018.84,1492.13 1018.84,1646.1 1030,1657.26 1030,1800 1065,1835 1065,2045 v1(1070,2050)
D1/sTEMP_ALERT_R: J7.3 U6.62 | length 752.8
  Top Layer w8: U6.62 1007.68,2037.68 v1(1045,2075) 1180,2210 v1(1180,2240)
  Bottom Layer w8: v1(1180,2240) 1390,2240 1415,2265 J7.3
D2/sLIGHT_INT_M: J6.3 U6.63 | length 482.6
  Top Layer w8: U6.63 977.36,2057.36 v1(1020,2100) 1150,2230 v1(1150,2240)
  Bottom Layer w8: v1(1150,2240) 1150,2330 J6.3
D3/sTEMP_ALERT_L: J5.3 U6.64 | length 488.2
  Top Layer w8: U6.64 957.05,2077.05 990,2110 990,2220 v1(1020,2250)
  Bottom Layer w8: J5.3 885,2335 929.79,2290.21 929.79,2280.21 949.16,2260.84 961.06,2260.84 971.9,2250 v1(1020,2250)
D4/sUSB_DATA_N: R3.2 U6.43 | length 1548.8
  Top Layer w8: U6.43 733.74,1578.26 760,1552 760,1520 857.27,1422.73 v1(952.73,1422.73) ; R3.2 v1(915,390)
  Bottom Layer w8: v1(915,390) 914.97,635.03 900,650 900,793.72 930,823.71 930,1010 973.21,1053.21 973.21,1402.24 v1(952.73,1422.73)
D5/sUSB_DATA_P: R4.2 U6.44 | length 1570.7
  Top Layer w8: U6.44 753.42,1587.58 785,1556 785,1530 866.21,1448.79 v1(1009.21,1448.79) ; R4.2 v1(955,415)
  Bottom Layer w8: v1(955,415) 972,432 972,991.54 1010.87,1030.41 1010.87,1447.13 v1(1009.21,1448.79)
E0/sBMS_S\H\D\N\: U3.8 U6.9 | length 2125.4
  Top Layer w8: v1(670,2350) 674.68,2345.31 U6.9 ; U3.8 1373.74,1085 v1(1374.37,1085.63)
  Bottom Layer w8: v1(670,2350) 695.52,2350 701.37,2355.84 718.63,2355.84 724.48,2350 850,2350 870,2330 870,2328.79 914.79,2284 914.79,2274 942.94,2245.84 954.85,2245.84 965.69,2235 995,2235 1105.84,2124.16 1105.84,1916.16 1166,1856 1166,1736 1125,1695 1125,1326.21 1241.21,1210 1350,1210 1374.37,1185.63 v1(1374.37,1085.63)
E1/sBMS_C\H\R\G\: R19.2 U3.1 U6.8 | length 1681.9
  Top Layer w8: U6.8 694.37,2324.37 705,2335 v1(710,2335) ; 914.37,1270.94 949.05,1270.94 v1(949.37,1270.63) 1064.37,1155.63 U3.1
  Bottom Layer w8: v1(710,2335) 746.21,2335 779.16,2302.06 779.16,2301.37 791.37,2289.16 792.06,2289.16 1025,2056.21 1025,1816.21 1015,1806.21 1015,1663.47 1000,1648.47 1000,1500 931.89,1431.89 931.89,1409.85 949.37,1392.37 v1(949.37,1270.63)
E2/sBMS_A\C\P\R\: R18.2 U3.10 U6.7 | length 1916.4
  Top Layer w8: U6.7 714.05,2273.53 750.52,2310 v1(800,2310) ; U3.10 1283.11,1124.37 1324.37,1165.63 v1(1324.37,1185.63) 1399.68,1185.63 R18.2
  Bottom Layer w8: v1(800,2310) 867.57,2310 899.79,2277.79 899.79,2267.79 936.73,2230.84 948.63,2230.84 959.48,2220 988.79,2220 1090.84,2117.94 1090.84,2041.37 1080,2030.52 1080,1810 1120.84,1769.16 1120.84,1741.37 1110,1730.52 1110,1280 1204.37,1185.63 v1(1324.37,1185.63)
E3/sBMS_\F\A\U\L\T\: R16.2 U3.3 U6.6 | length 1782.6
  Top Layer w8: U6.6 735.42,2155.5 735.42,2265.42 v1(750,2280) ; R16.2 v1@824.68,1144.68 ; v1(825.94,1144.68) 955.14,1144.68 1014.83,1085 U3.3
  Bottom Layer w8: v1(750,2280) 755.84,2274.16 785.84,2274.16 1010,2050 1010,1822.43 1000,1812.43 1000,1669.68 825.94,1495.63 v1(825.94,1144.68)
F1/sAG_INT1: R14.2 U4.11 U6.29 | length 1323.4
  Top Layer w8: v1(140,1690) 140,1785 195.83,1840.83 U6.29 ; U4.11 324.68,1085.31 v1(354.84,1055.16) 385,1025 R14.2
  Bottom Layer w8: v1(140,1690) 180,1650 180,1633.93 296.12,1517.82 312.18,1517.82 331.16,1498.84 331.16,1078.84 v1(354.84,1055.16)
F2/sAG_INT2: R11.2 U4.9 U6.30 | length 1432.7
  Top Layer w8: v1(150,1640) 170,1660 170,1696.88 158.11,1708.78 158.11,1781.89 197.36,1821.14 U6.30 ; U4.9 288.42,1016.57 320,985 v1(320,928.33) 331.67,928.33 R11.2
  Bottom Layer w8: v1(150,1640) 152.72,1640 305,1487.72 305,1030 320,1015 v1(320,928.33)
F3/sGYRO_INT1: U5.3 U6.31 | length 1948.8
  Top Layer w8: v1(410,1660) 410,1790 421.46,1801.46 U6.31 ; v1(970,1750) v1(1100,1750) ; v1(1080,1590) 1130,1540 v1(1160,1540) ; U5.3 1505.63,1325.63 1520,1340 v1(1520,1580)
  Bottom Layer w8: v1(410,1660) 430.52,1660 451.37,1680.84 468.63,1680.84 469.48,1680 480,1680 505,1655 935,1655 970,1690 v1(970,1750) ; v1(1080,1590) 1080,1600 1095,1615 1095,1745 v1(1100,1750) ; v1(1160,1540) 1240,1540 1280,1580 v1(1520,1580)
F4/sIO_SW1: C35.2 R33.1 SW1.1 U6.5 | length 932.4
  Top Layer w8: SW1.1 130,2182.21 v1(130,2230) 130.31,2230.31 C35.2 R33.1 ; v1(370,2330) v1(460,2330) ; U6.5 753.42,2243.42 v1(760,2250)
  Bottom Layer w8: v1(130,2230) 270,2230 v1(370,2330) ; v1(460,2330) 610.53,2330 690.53,2250 v1(760,2250)
Net1_1: 1.1 R15.1 | length 62.4
  Top Layer w8: 1.1@575,1085 580,1090 R15.1
NetC7_1: C7.1 U4.8 | length 80.2
  Top Layer w8: U4.8 258.9,1006.1 280,985 C7.1
NetC9_2: C9.2 U3.4 | length 149.8
  Top Layer w8: C9.2 950.31,1114.68 999.68,1065.31 U3.4
NetC11_1: C11.1 U4.2 | length 80.1
  Top Layer w8: C11.1 141.63,1129.37 166,1105 U4.2
NetC17_1: C17.1 U5.16 | length 171.5
  Top Layer w8: C17.1 1116.44,1331.76 1211.13,1331.76 1224.68,1345.31 U5.16
NetIND1_1: IND1.1 R22.1 | length 53.8
  Top Layer w8: R22.1 IND1.1
NetIND2_1: IND2.1 R24.1 | length 53.8
  Top Layer w8: R24.1 IND2.1
NetJ1_1: J1.1 L1.1 | length 145
  Top Layer w10: L1.1 865,274 906.79,232.21 J1.1
NetJ1_2: J1.2 R3.1 | length 131
  Top Layer w8: R3.1 915,270 932.38,252.62 J1.2
NetJ1_3: J1.3 R4.1 | length 125
  Top Layer w8: R4.1 957.97,305.53 J1.3
NetJ1_5: J1.5 RS1.2 TP1.1 | length 229.6
  Top Layer w10: J1.5 1009.15,257.15 1021,269 1021,317.35 RS1.2 1021.65,320 TP1.1
NetJ2_1: J2.1 RS2.2 TP3.1 | length 268.2
  Top Layer w8: RS2.2@1409.37,501.85 RS2.2 1503.15,501.85 TP3.1
  Top Layer w10: J2.1 RS2.2@1409.37,501.85
NetQ1_1: Q1.1 R8.2 U2.4 | length 574.2
  Top Layer w8: U2.4 1177.4,752.6 v1(1190,740) ; Q1.1 1446.89,750 v1(1520,750) 1520,680.63 R8.2
  Bottom Layer w8: v1(1190,740) 1200,750 v1(1520,750)
NetR5_1: R5.1 WAKE.2 | length 231.6
  Top Layer w8: WAKE.2@935,591.5 WAKE.2 1018.5,591.5 1094.68,515.31 R5.1
NetR6_1: R6.1 R7.2 | length 40
  Top Layer w10: R6.1 R7.2
NetR30_1: R30.1 RESET.1 | length 124
  Top Layer w8: R30.1 1470.31,2009.61 1495.71,2035 RESET.1
NetU6_1: U6.1
NetU6_4: U6.4 | length 158.8
  Top Layer w8: U6.4 773.11,2224.32 829.68,2280.9 v1(829.68,2289.16)
NetU6_10: U6.10 | length 175.3
  Top Layer w8: v1(645,2325) 655,2315 U6.10
NetU6_28: U6.28
NetU6_45: U6.45 | length 113.7
  Top Layer w8: U6.45 773.11,1653.95 782,1645.06 v1(782,1595)
NetU6_53: U6.53
NetU6_57: U6.57
NetU6_58: U6.58
NetU6_59: U6.59
NetU6_60: U6.60
OSC0: C22.2 U6.40 Y1.3 | length 599.4
  Top Layer w8: C22.2 556.69,1456.38 Y1.3 512.16,1382.83 495,1400 495,1443.79 546.21,1495 670,1495 674.68,1499.68 U6.40
OSC1: C13.2 U6.41 Y1.1 | length 586.6
  Top Layer w8: C13.2 643.31,1161.38 Y1.1 646.14,1240 680,1240 694.37,1254.37 U6.41
sAG_SA0: R10.1 U4.7 | length 251.3
  Top Layer w8: R10.1 214.68,869.68 239.21,894.21 U4.7
sAG_SA1: R12.1 U4.10 | length 157
  Top Layer w8: U4.10 289.05,1065 310,1065 325,1050 325,1025 v1(345,1005) 370,980 R12.1
sGND: 1.2 C1.1 C2.1 C3.1 C4.1 C5.1 C6.1 C7.2 C8.1 C9.1 C10.1 C11.2 C12.1 C13.1 C14.1 C15.1 C16.1 C17.2 C18.1 C19.1 C20.1 C21.2 C22.1 C23.2 C24.2 C25.2 C26.2 C27.2 C28.2 C29.2 C30.2 C31.2 C32.2 C33.2 C34.2 C35.1 GND.1 IND1.2 IND2.2 J3.3 J3.5 J3.9 J4.1 J5.5 J6.5 J7.5 R1.1 R8.1 R9.1 R12.2 R13.1 R20.2 R31.1 RESET.3 RS1.1 RS2.1 SD1.6 SW1.3 TP2.1 TP4.1 U1.4 U1.5 U1.9 U2.2 U3.5 U3.6 U3.11 U4.3 U4.5 U4.12 U4.13 U4.16 U5.1 U5.5 U5.6 U5.7 U5.8 U5.9 U5.10 U5.14 U5.19 U5.20 U5.21 U5.22 U5.23 U5.24 U6.3 U6.12 U6.27 U6.35 U6.39 U6.55 WAKE.4 Y1.2 Y1.4 | length 8161.2
  Top Layer w6: v1(120,1055) C11.2 ; C35.1@170,2269.68 C35.1 v1(216,2270) ; C3.1@251.85,750 C3.1 251.85,801.35 C3.1@251.85,820 ; SW1.3 290.71,2210.71 v1(310,2230) ; v1(545,720) 570.47,745.47 U1.4 ; U1.5 744.53,745.47 v1(750,740)
  Top Layer w8: C11.2 124.68,1085.31 U4.3 ; v1(190,985) U4.5 ; U4.16 219.68,1134.68 C14.1 v1(219.68,1234.68) ; SD1.6 239.84,349.84 289.68,399.68 C2.1 v1(715,455) ; v1(280,875) C7.2 ; U4.12 U4.13 288.42,1158.42 290,1160 C12.1 v1(355,1110) 373.15,1091.85 C10.1 ; C29.2@317.56,1875 322.24,1870.31 C27.2 405.31,1870.31 415.2,1880.2 U6.27 560.2,1880.2 560,1880 v1(555,1880) ; IND2.2 IND1.2 365,1520 v1(400,1555) ; C25.2 347.56,1730 C25.2@347.87,1729.68 ; C20.1 C19.1 385,1390 430,1435 v1(435,1435) 435,1453.79 539.16,1557.94 539.16,1579.16 v1(545,1585) 545,1610 575.16,1640.16 575.16,1703.9 U6.35 ; R12.2 485,980 500,995 v1(535,995) 589.35,995 591.85,997.5 C6.1 ; 1.2@512.01,1085 512.01,1095 512.01,1142.01 530,1160 v1(555,1160) ; v1(535,910) 576.85,910 591.85,925 C6.1 ; v1(535,960) C6.1 ; Y1.4 555,1235.47 v1(555,1160) ; v1(560.31,2399.68) C34.2 560.31,2334.68 615.63,2279.37 U6.12 ; v1(585,1530) 585.31,1530.31 C23.2 ; C22.1 v1(643.31,1460) Y1.2 ; C13.1 v1(555,1160) ; v1(620,1800) 655,1765 U6.39 U6.39@656.68,1703.31 ; v1(716.5,591.5) WAKE.4 ; v1(729,1412) C24.2@729,1479 ; U6.3 792.79,2222.79 839.37,2269.37 C33.2 ; C15.1 v1(799.37,1400.63) ; v1(820,1925) 845.12,1899.88 U6.55 999.57,1899.88 C32.2 1042.87,1900.31 C31.2 1067.44,1902.44 1120,1955 v1(1160,1955) 1160,1930 C28.2 ; v1(850,1075) 934.68,1075 C9.1 955.31,1075.31 985,1045.63 U3.5 ; R9.1 v1(1020,700) ; C31.2@1037.87,1910.31 C31.2@1040,1912.44 ; C17.2 v1(1114.68,1245.31) 1134.68,1245.31 1150,1260.63 C16.1 ; C21.2 1114.68,1465.31 1129.68,1480.31 v1(1174.68,1480.31) ; C18.1@1174.68,1410 1174.68,1470.31 ; C16.1@1175.31,1266.57 1205.94,1266.57 1225.63,1286.26 U5.19 ; v1@1184.37,1480 R20.2 ; U3.6 1259.37,1045.63 1299.68,1005.31 R13.1 v1(1350,940) ; R31.1 1255,2055 1250,2060 v1(1250,2090) RESET.3@1334.29,2090 ; U5.14 1335.69,1384.68 1337.37,1383 v1(1354.68,1383) ; v1(1300,1540) J3.3 ; U5.20 U5.21 U5.22 ; v1(1350,1540) J3.5 ; v1(1359,1306) 1354.68,1301.68 U5.22 ; U5.8 U5.9 U5.10 v1(1354.68,1383) ; v1(1415,1890) C30.2 ; v1(1420,665) 1435,680 R8.1 ; U5.1 1437,1280.72 1437,1274 1431.54,1268.54 U5.24 U5.23 U5.22 ; U5.5 U5.6 ; U5.7 U5.6 ; v1(1450,1540) J3.9 ; v1(1354.68,1383) 1387.63,1383 1389.31,1384.68 U5.6
  Top Layer w10: v1(715,195) C1.1 R1.1 ; RS1.1 1109.65,424.65 TP2.1 ; RS2.1@1420,608.15 1501.85,608.15 TP4.1
  Top Layer w13: RS1.1 v1(1020,495)
  Top Layer w15: C3.1@251.85,750 v1(200,750) v1(200,790) ; C3.1 246.85,790 v1(200,790) ; C3.1@251.85,801.35 229.77,823.43 206.57,823.43 v1(200,830) v1(200,790) ; C26.2 299.68,1729.68 v1(300,1730) C25.2@347.56,1730 ; v1(400,1555) 485,1555 v1(490,1560) ; C10.1 508.86,1091.85 1.2@512.01,1095 ; v1(490,2260) v1(490,2390) ; v1(500,1230) 549.53,1230 Y1.4@555,1235.47 ; v1(770,2510) v1(889.24,2510) ; v1(840,780) 850,790 v1(930,790) U2.2 ; C33.2 959.37,2269.37 980,2290 v1(980,2330) ; C4.1 998.15,910 v1(1030,910) ; v1(1100,2300) v1(1200,2300) ; C5.1 v1(1350,940) ; v1(1350,2300) v1(1460,2300) ; RS2.1@1420,608.15 v1(1420,665) ; v1(1445,970) C8.1 ; v1(1620,1250) v1(1620,1350)
  other v1: 630.31,755.31 669.68,755.31 630.31,794.68 669.68,794.68 1128.35,1063.35 1171.65,1063.35 1128.35,1106.65 1171.65,1106.65
sGYRO_SA0: R20.1 U5.13 | length 84.4
  Top Layer w8: R20.1 1259.37,1440.63 1269.68,1430.31 1279.88,1420.12 U5.13
sH\I\B\: U1.6 U6.33 | length 1440.3
  Top Layer w8: v1(480,1610) 480,1615 536.89,1671.89 U6.33 ; U1.6 796.44,765.16 v1(800,768.72)
  Bottom Layer w8: v1(480,1610) 440,1570 440,1459.48 455.84,1443.63 455.84,1426.37 440,1410.52 440,1160.54 450.84,1149.7 450.84,989.16 510,930 510,800 600,710 750,710 800,760 v1(800,768.72)
sPM_MODE/sBMS_PROG: R13.2 U2.5 U3.7 | length 551.3
  Top Layer w8: U2.5 1107.24,785 v1(1190,785) ; U3.7 1289.68,1065.31 v1(1310.31,1044.68) R13.2
  Bottom Layer w8: v1(1190,785) 1155,820 1155,889.37 v1(1310.31,1044.68)
sPWR_3V3: C2.2 C3.2 C10.2 C12.2 C14.2 C16.2 C18.2 C21.1 C24.1 C25.1 C26.1 C28.1 C33.1 C34.1 J3.1 J5.6 J6.6 J7.6 LDO.1 R2.2 R10.2 R11.1 R14.1 R16.1 R18.1 R19.1 R21.2 R23.2 R25.1 R26.1 R27.2 R28.2 R29.2 R32.1 R33.2 SD1.4 U1.1 U1.2 U1.3 U4.1 U4.14 U5.4 U5.15 U5.17 U5.18 U6.2 U6.11 U6.26 U6.42 U6.54 | length 5188.3
  Top Layer w8: v1(110,830) 139.69,830 R10.2 ; R27.2 R28.2 200.32,1870 v1(220,1870) ; R33.2 220,2310 216,2314 v1(213,2314) ; U4.1 190,1155 180.31,1164.68 C14.2 180.31,1234.68 v1(180,1235) 180,1255 195,1270 265,1270 280,1255 280,1200 279.37,1199.37 ; U4.14 258.9,1178.9 279.37,1199.37 ; SD1.4 326.46,316.46 370.31,360.31 C2.2 v1(715,320) R2.2 ; 380.16,784.84 v1(485,784.84) U1.2 ; R11.1 463.33,928.33 v1(465,930) ; C10.2 428.78,1199.37 C12.2 279.37,1199.37 ; R14.1 500,1025 520,1045 v1(620,1045) ; U6.26 519.88,1899.88 540,1920 v1(555,1920) ; U1.3 530.16,765.16 500,735 v1(480,735) 445,735 430,750 358.31,750 358.31,784.84 C3.2 358.15,820 430,820 445,835 v1(480,835) 500,835 530.47,804.53 U1.1 ; v1(599,2400) 599,2350.69 C34.1 599.69,2320.77 633.63,2286.83 633.63,2155.5 U6.11 ; C24.1 730,1548 714.05,1563.95 U6.42 714.05,1769.05 v1(745,1800) ; v1(775,1050) R16.1 ; U6.2 812.48,2192.48 850,2230 C33.1 920,2210 v1(940,2210) ; v1(820,1850) 850.2,1880.2 U6.54 949.8,1880.2 970,1860 1090,1860 C28.1 ; R19.1 v1(904.37,1360.63) ; R21.2 964.68,1500.31 v1(965,1500) ; R23.2 v1(1060,1619.69) ; C21.1 1142.24,1382.76 1159.37,1365.63 C18.2 ; R26.1 1150,1724.68 R25.1 1150,1640 v1(1190,1600) J3.1 ; C16.2 1180.63,1305.94 U5.18 U5.17 1305,1325.63 v1(1324.68,1345.31) 1305,1365 U5.15 1279.25,1365.63 C18.2 ; C18.2@1174.68,1370.63 C18.2@1178.63,1366.68 ; C18.2@1175.31,1365 C18.2 ; R32.1 1390,1985 1440,1935 R29.2 ; v1(1384.68,1345.31) U5.4 ; R18.1 v1(1480,1185)
  Top Layer w10: v1(1324.68,1345.31) v1(1384.68,1345.31)
  Bottom Layer w8: v1(904.37,1360.63) 904.37,1474.37 930,1500 v1(965,1500)
  Bottom Layer w10: v1(1020,2300) v1(1020,2420) ; v1(1290,2300) v1(1290,2420) ; v1(1480,1185) 1595,1185 v1(1600,1190)
  other v1: 1410,1965
sPWR_3V7: BAT.1 C8.2 J2.2 Q1.3 R7.1 R17.2 U3.9 | length 1524.1
  Top Layer w8: R7.1 1294.68,554.68 1295,555 ; BAT.1@1235,465 v1(1295,465) ; U3.9 1318.42,1104.68 v1(1349.37,1135.63) 1443.78,1135.63 C8.2@1444.09,1135.31
  Top Layer w15: J2.2 1330.63,429.37 v1(1295,465) 1295,555 1295,740 1275,760 v1(1275,790) ; Q1.3 v1(1275,790) ; C8.2@1444.09,1135.31 R17.2 1520,950 1450,880 1320,880 1275,835 v1(1275,790)
sPWR_5V0: C4.2 C15.2 L1.2 R15.2 U2.1 U3.2 U6.46 USB.1 | length 2192.7
  Top Layer w8: R15.2 700,1090 730,1120 730,1205 745.63,1220.63 C15.2 ; USB.1 v1(865,430) ; U6.46 792.79,1656.75 805,1644.54 805,1555 v1(860,1500) ; C15.2@814.37,1220.63 823.15,1211.85 v1(886.85,1211.85) 928.6,1211.85 1035.77,1104.68 U3.2
  Top Layer w13: L1.2 v1(865,430) ; v1(886.85,836.85) C4.2
  Top Layer w15: v1(886.85,836.85) 896.3,827.4 U2.1
  Bottom Layer w8: v1(860,1500) 860,1238.7 v1(886.85,1211.85)
  Bottom Layer w13: v1(865,430) 880,445 880,830 v1(886.85,836.85) ; v1(886.85,1211.85) v1(886.85,836.85) ; v1@889.53,836.85 v1(886.85,836.85)
sR\E\S\E\T\: C30.1 J3.10 R29.1 R30.2 U6.38 | length 1429.2
  Top Layer w8: U6.38 635.31,1624.68 v1(645,1615) ; v1(870,1600) 930,1600 980.84,1650.84 1089.16,1650.84 v1(1150,1590) ; J3.10 1515,1750 1515,1884.69 C30.1 R29.1 R30.2
  Bottom Layer w8: v1(645,1615) 645.84,1615.84 854.16,1615.84 v1(870,1600) ; v1(1150,1590) 1150,1690 1210,1750 v1(1510,1750)
sUNREG: C5.2 C6.2 Q1.2 U1.7 U1.8 U2.6 | length 1521.6
  Top Layer w8: C6.2@690,950 708.15,950 C6.2 ; U1.7 764.84,784.84 770,790 ; U1.8 765.47,804.53 770,800
  Top Layer w15: 770,790 770,800 770,950 760,960 C6.2 698.15,995 v1(775,995) 790,980 v1(1020,980) 1024.34,984.34 1080.66,984.34 1125,940 C5.2 ; U2.6 1177.4,827.4 v1(1190,840) 1190,908.15 C5.2@1191.85,910 ; Q1.2 v1(1517.4,827.4)
  Bottom Layer w15: v1(1190,840) 1202.6,827.4 v1(1517.4,827.4)
sVBAT: C23.1 R17.1 U6.37 | length 1350.1
  Top Layer w8: U6.37 615.63,1605.63 605.31,1595.31 v1(605.31,1569.68) C23.1 ; v1(765,1445) 800,1445 840.27,1404.73 937.01,1404.73 960,1381.74 960,1320 1100,1180 1265,1180 1305,1220 1505,1220 1520,1205 R17.1
  Bottom Layer w8: v1(605.31,1569.68) 730,1445 v1(765,1445) v1@768.84,1448.84
sVDDC: C27.1 C29.1 C31.1 C32.1 U6.25 U6.56 | length 880.3
  Top Layer w8: C29.1@262.44,1875 C29.1 262.44,1907.44 275,1920 364.68,1920 C27.1 400.55,1909.68 410.43,1919.57 U6.25 511.57,1919.57 555,1963 823,1963 866.43,1919.57 U6.56 964.57,1919.57 984.68,1939.68 C32.1 1017.87,1957.56 C31.1
sW\A\K\E\: R5.2 R6.2 U6.32 | length 2099.1
  Top Layer w8: v1(460,1660) 460.12,1660.12 U6.32 ; v1(900,1630) 938.79,1630 1013.79,1705 v1(1055,1705) ; v1(1135,600) R5.2 R6.2
  Bottom Layer w8: v1(460,1660) 480,1640 890,1640 v1(900,1630) ; v1(1055,1705) 1055,1661.04 1033.84,1639.89 1033.84,1027.93 990,984.09 990,640 1030,600 v1(1135,600)
TCK: J3.4 R31.2 U6.52 | length 623.9
  Top Layer w8: U6.52@908.94,1840 1120,1840 1165,1885 1189.16,1885 v1(1217.31,1913.15) ; R31.2 1255,1950.84 v1(1217.31,1913.15) ; J3.4 1300,1830.46 v1(1217.31,1913.15)
TDI: J3.8 R32.2 U6.50 | length 727.3
  Top Layer w8: U6.50 1166.46,1801.46 v1(1195,1830) ; v1@1304.68,1940.31 v1(1305,1940) 1400,1845 J3.8 ; v1@1305.31,1940.94 R32.2
  Bottom Layer w8: v1(1195,1830) v1(1305,1940)
TDO: J3.6 R26.2 U6.49 | length 663.2
  Top Layer w8: U6.49 1188.23,1781.77 v1(1190,1780) 1190,1725.31 R26.2 ; v1(1305,1895) 1350,1850 J3.6
  Bottom Layer w8: v1(1190,1780) v1(1305,1895)
TMS: J3.2 R25.2 U6.51 | length 576.4
  Top Layer w8: U6.51 1141.14,1821.14 1180,1860 1215,1860 1250,1825 J3.2 1250,1685 1240,1675 R25.2
XOSC0: C19.2 U6.34 Y2.1 | length 506.6
  Top Layer w8: Y2.1 345.63,1300.16 C19.2 345.63,1385.63 524.16,1564.16 524.16,1601.26 528.34,1605.44 528.34,1614.56 556.57,1642.79 U6.34
XOSC1: C20.2 U6.36 Y2.2 | length 473.7
  Top Layer w8: Y2.2 464.37,1300.16 C20.2 480,1385.63 480,1450 555,1525 555,1555 580,1580 580,1605 595.94,1620.94 U6.36
pads on no net: J1.4 J1.6 J1.7 J1.9 J1.10 J1.11 J2.0 J3.7 J5.1 J6.1 J7.1 RESET.2 RESET.4 SD1.8 SD1.9 SD1.10 SD1.11 SW1.2 SW1.4 U4.15 U6.65 U6.66 WAKE.1 WAKE.3

## Polygon pours and split planes (outlines as drawn)
sPWR_3V3 on Top Layer "Top layer_full" (solid, remove dead copper, pour order 2): 0,2600 1680,2600 1680,0 0,0
sGND on Bottom Layer "Bottom layer_full" (solid, remove dead copper, pour order 4): 0,2600 1680,2600 1680,0 0,0

## Keep-outs
Keep-Out Layer:
  lines w10: 0,0 0,2600 1680,2600 1680,0 0,0

## Silkscreen, mask and mechanical layers (free items; w line width, h text height)
Mechanical 1:
  lines w10: 0,0 1680,0 1680,2600 0,2600 0,0

## Text inside footprints (layer, text, board x,y; h text height)
J1: Mechanical 6 "PCB EDGE" at 674.51,18.7 h11.81
J2: Top Overlay "+-" at 1317.2,421.5 h60
J5: Top Overlay "5" at 984.61,2380 h39.37; Top Overlay "1" at 772.01,2380 h39.37
J6: Top Overlay "5" at 1249.61,2380 h39.37; Top Overlay "1" at 1037.01,2380 h39.37
J7: Top Overlay "5" at 1514.61,2380 h39.37; Top Overlay "1" at 1302.01,2380 h39.37